# Altium PCB imx8mnano.PcbDoc
Units mil, origin at the board's own origin, x right, y up, seen from the top; angles counter-clockwise.
Board outline 6000 x 4000 mil, 4 copper layers (Top Layer, SIG1, SIG2, Bottom Layer), stack 20.374 mil thick; 10 components, 16 nets, 597 pads, 0 vias.
Unrouted connection lines stored in the file: 78.
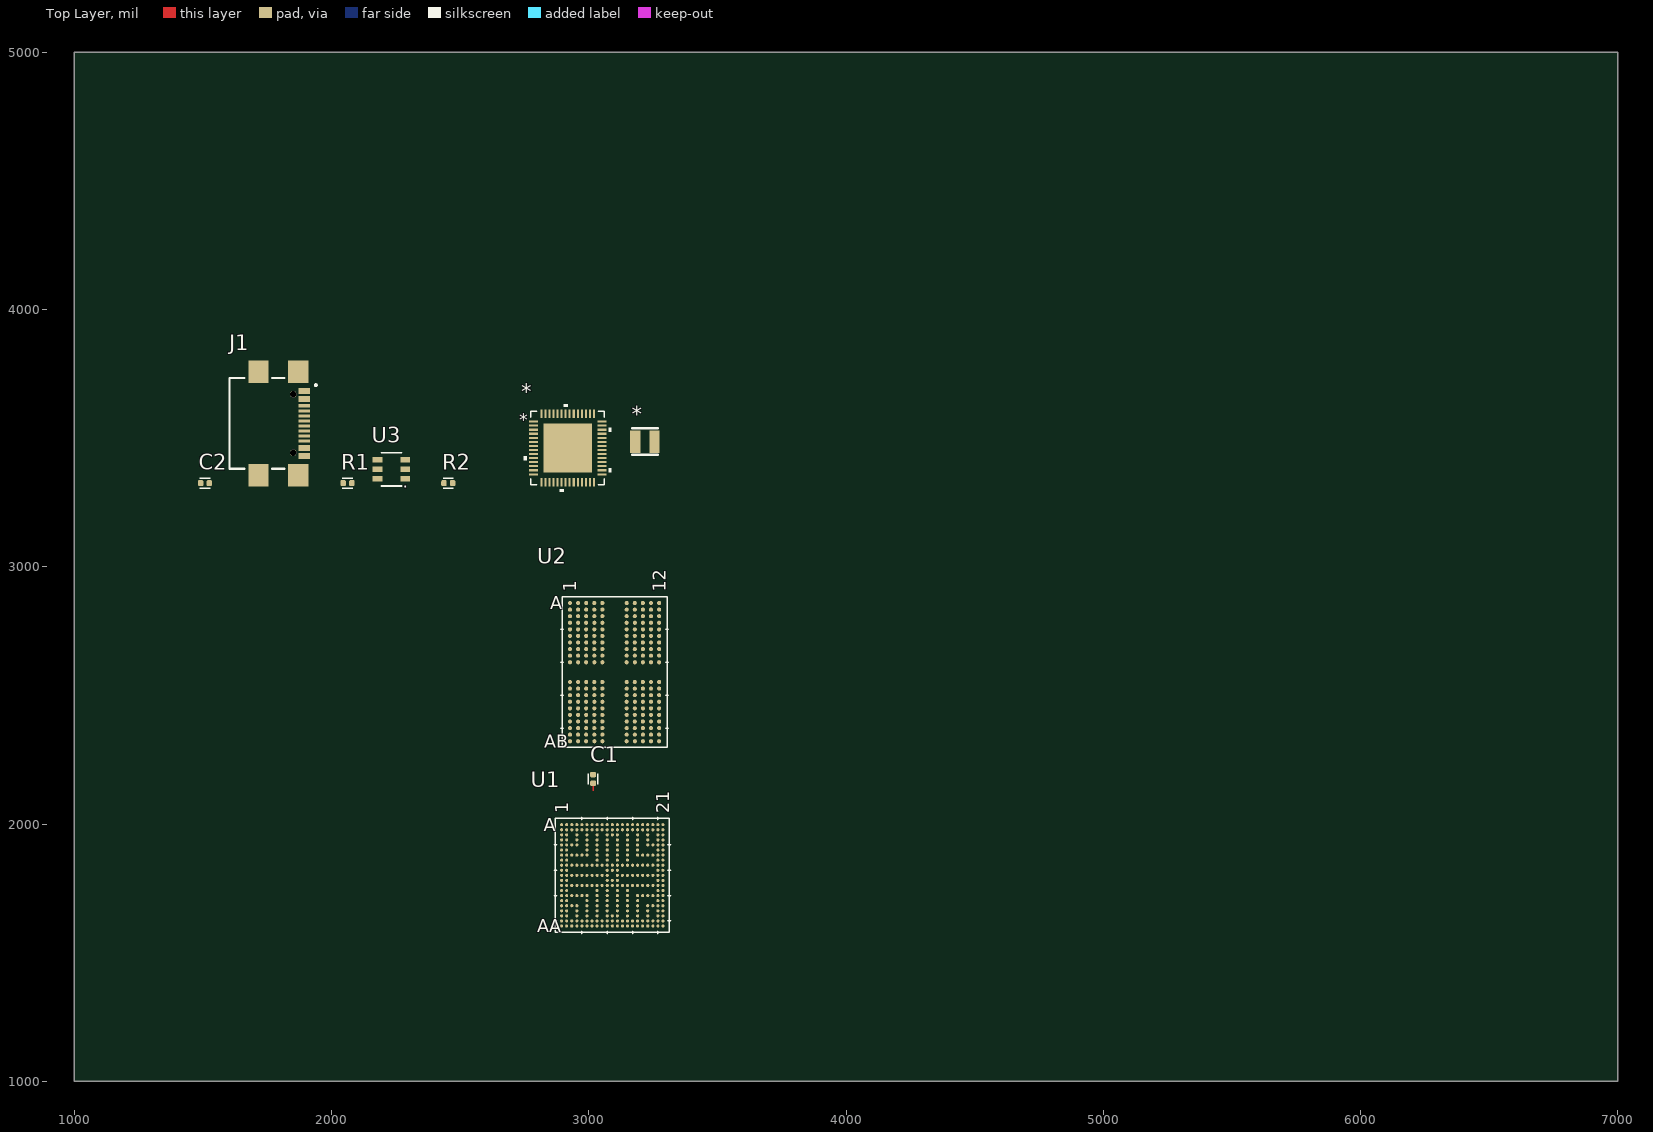
[diagram p0: Top Layer view]
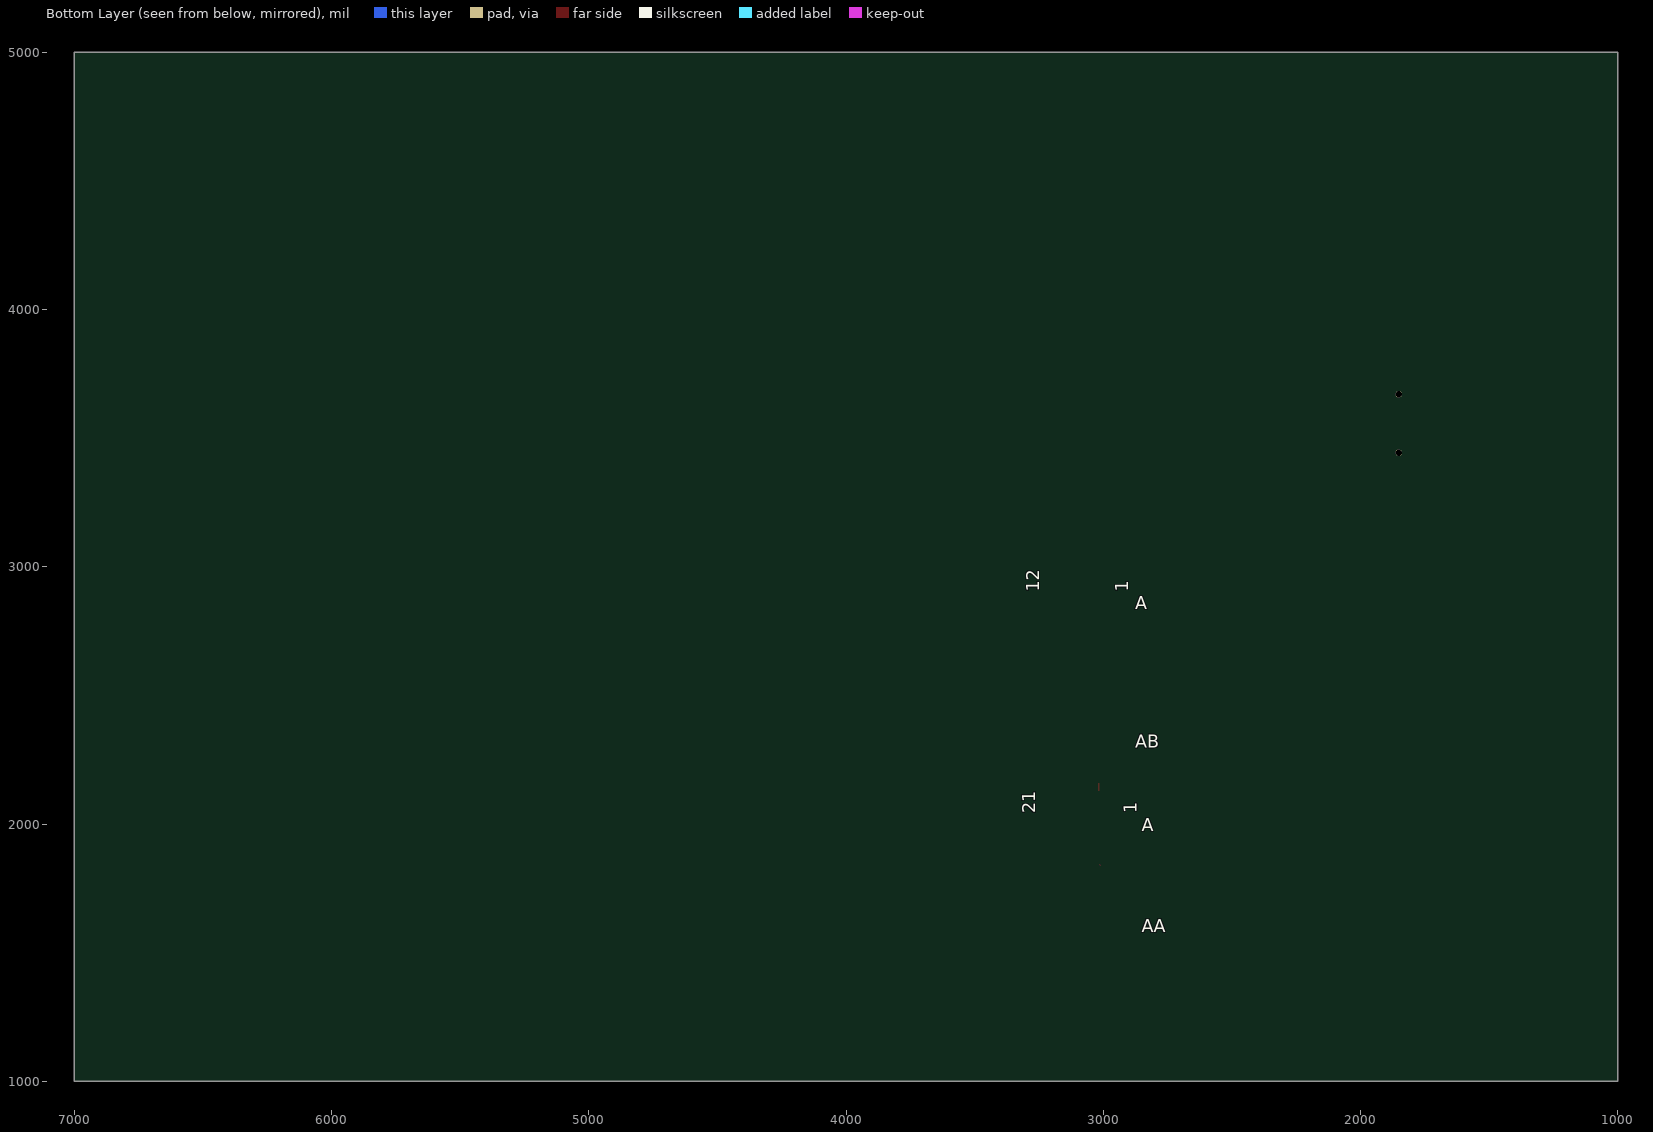
[diagram p1: Bottom Layer view, seen from below]
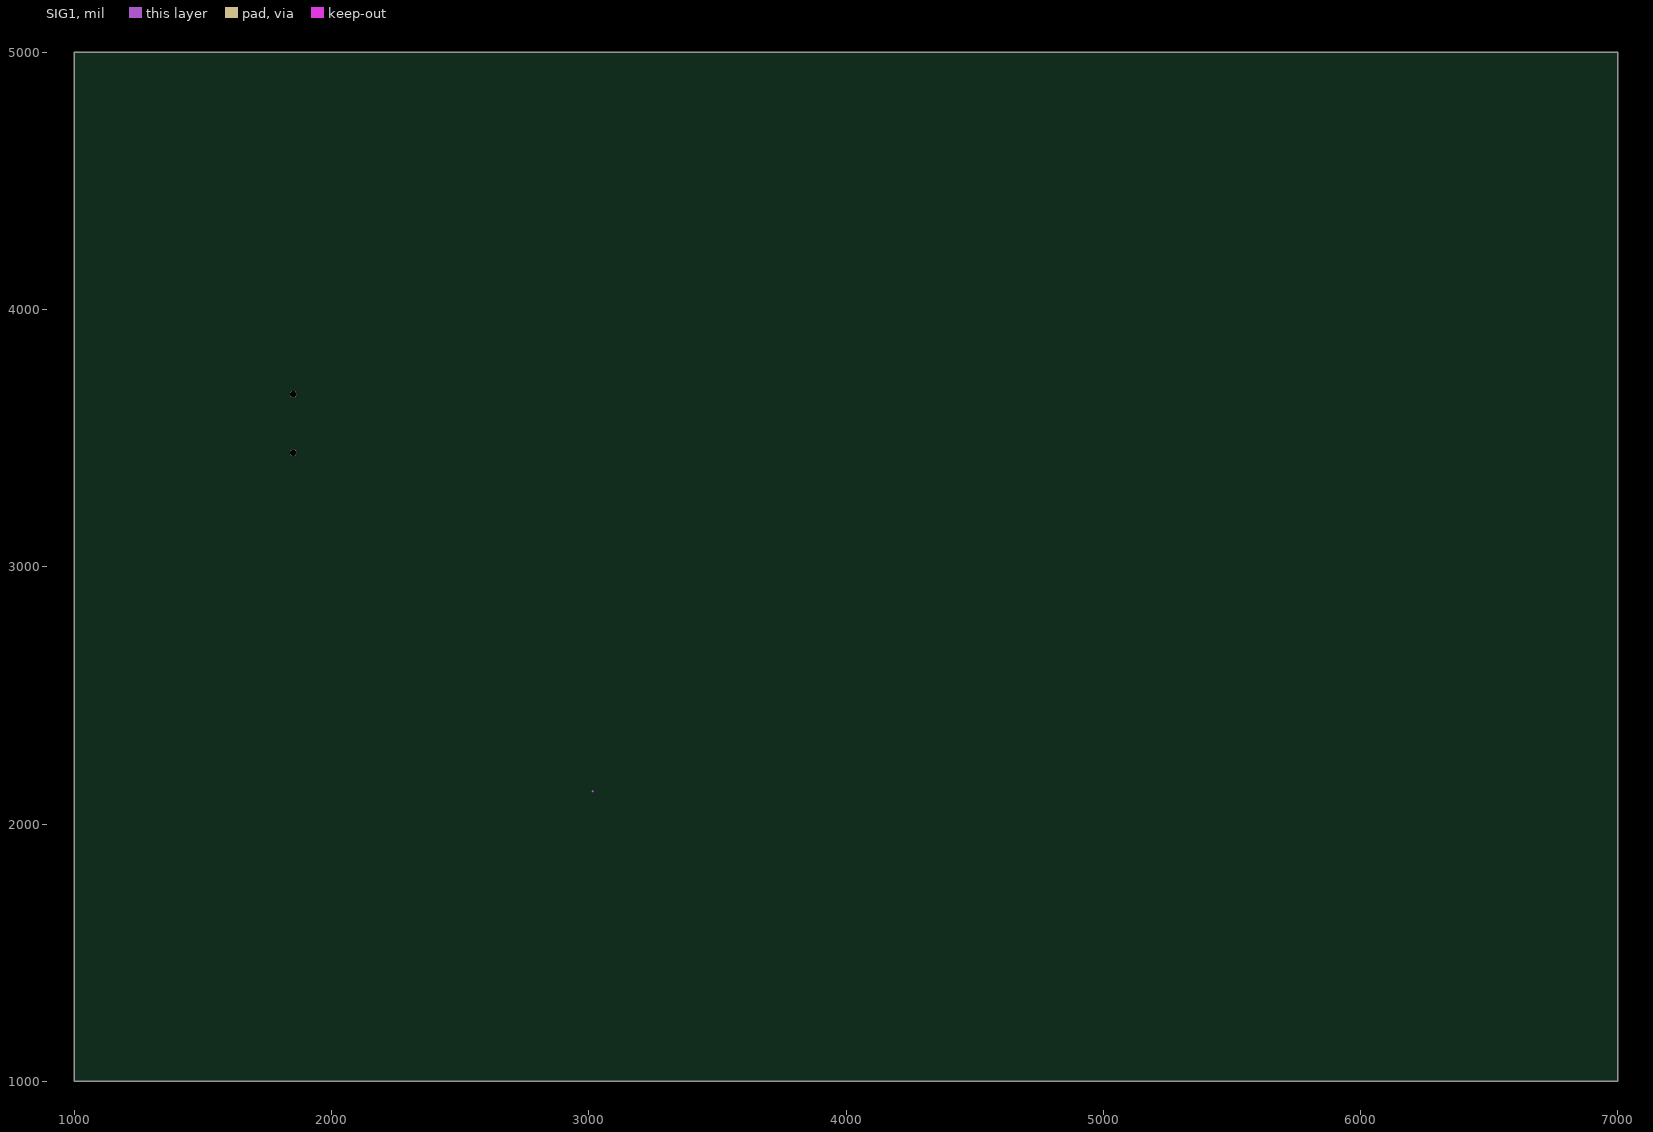
[diagram p2: SIG1]

## Layer stack, top to bottom
Top Solder: solder mask 0.4, Solder Resist, Dk 3.5
Top Layer: signal copper 1.378
Dielectric 4: prepreg 2.8, PP-006, Dk 4.1
Dielectric 2: prepreg 2.8, PP-006, Dk 4.1
SIG1: signal copper 0.709
Dielectric 1: core 5, Core-016, Dk 4.3
SIG2: signal copper 0.709
Dielectric 3: prepreg 2.8, PP-006, Dk 4.1
Dielectric 5: prepreg 2.8, PP-006, Dk 4.1
Bottom Layer: signal copper 1.378
Bottom Solder: solder mask 0.4, Solder Resist, Dk 3.5

## Board outline
1000,1000 7000,1000 7000,5000 1000,5000

## Design rules (kind name [scope] priority, off if disabled: settings)
Clearance Clearanceddr4 [WithinRoom('LPDDR4')] p1: gap=1 ignorepadtopadclearanceinfootprint=FALSE
Clearance [WithinRoom('imx8mnano_power')] p2: gap=1 ignorepadtopadclearanceinfootprint=FALSE
PolygonConnect [All] p1: connectstyle=Relief reliefconductorwidth=10 reliefentries=4 polygonreliefangle="90 Angle" airgapwidth=10
RoomDefinition USB [InComponentClass('USB')] p1: confinementstyle=ConfineIn formatcopy=TRUE lockcomponents=FALSE outline 2494,3817 1417,3817 1417,3197 2494,3197
RoomDefinition PMIC [InComponentClass('PMIC')] p2: confinementstyle=ConfineIn formatcopy=TRUE lockcomponents=FALSE outline 2549,3286.88 3368,3286.88 3368,3717.88 2549,3717.88
RoomDefinition imx8mnano_power [InComponentClass('imx8mnano_power')] p3: confinementstyle=ConfineIn formatcopy=TRUE lockcomponents=FALSE outline 2673,1508 3433,1508 3433,2232 2673,2232
RoomDefinition LPDDR4 [InComponentClass('LPDDR4')] p4: confinementstyle=ConfineIn formatcopy=TRUE lockcomponents=FALSE outline 2726.47,2258.77 3362.47,2258.77 3362.47,3101.77 2726.47,3101.77
RoutingVias Routingddr4 [All] p1: holewidth=3 width=10 viastyle="Through Hole" minholewidth=1.5 minwidth=10 maxholewidth=5 maxwidth=15
RoutingVias [WithinRoom('imx8mnano_power')] p2: holewidth=3 width=10 viastyle="Through Hole" minholewidth=1.5 minwidth=10 maxholewidth=5 maxwidth=15
SolderMaskExpansion SolderMaskExpansion_BGA [WithinRoom('imx8mnano_power') or WithinRoom('LPDDR4')] p1: expansion=0.57 istentingtop=FALSE
Width widthddr4 [WithinRoom('LPDDR4')] p1: maxlimit=5 minlimit=2 preferedwidth=3
Width widthtop [OnLayer('Top Layer') and not WithinRoom('imx8mnano_power')] p2: maxlimit=10 minlimit=10 preferedwidth=10
Width Widthimx [WithinRoom('imx8mnano_power')] p3: maxlimit=5 minlimit=2 preferedwidth=3
30 further rules are at their usual default settings.

## Classes and differential pairs
component class USB: C2 J1 R1 R2 U3
component class PMIC: *
component class imx8mnano_power: C1 U1
component class LPDDR4: U2

## Components (designator, comment, footprint, x,y, rotation, side; value= is the part's Value field where it differs from the comment)
* "PCA9450BHNY" HVQFN56_SOT949-6_NXP 2918,3461.88 r0 top
* "SPH252010H2R2MT" IND-SMD_L2.5-W2.0_SWPA252012S 3218,3486.26 r0 top
C1 "CL05A106MQ5NUNC" CL05A106MQ5NUNC 3017,2175.07 r90 top
C2 "104" CAPC1005X55N2 1508,3325 r180 top
J1 "USB-C" GCT_USB4110GFA 1851,3557 r270 top
R1 "5K1" RC0402 2062,3325 r180 top
R2 "5K1" RC0402 2454,3325 r180 top
U1 "MIMX8MN5DVPIZAA" MIMX8MN5DVPIZAA_NXP 3091.45,1800.38 r0 top
U2 "MT53E256M16D1FW-046 AIT:B" TFBGA200_10X14p5X1p1_FW_MRN-M 3100.23,2590.39 r0 top
U3 "USBLC6" SOT23-6L_STM 2233,3379 r180 top

## Footprints (in the part's own frame and the unit in brackets; to place one, negate y for a bottom-side part, rotate by r counter-clockwise, add the part's x,y. Pads: shape width x height; smd on the part's side, far side on the other; paste and mask are expansions set on the pad)
CAPC1005X55N2 [mm]
  rrect53% 0.54x0.6 smd: 1(-0.43,0) 2(0.43,0)
  silkscreen extent -0.5,-0.48 0.5,0.48, body extent -0.52,-0.28 0.52,0.28, height 0.56
CL05A106MQ5NUNC [mm]
  rrect53% 0.54x0.6 smd: 1(-0.43,0) 2(0.43,0)
  silkscreen extent -0.5,-0.48 0.5,0.48
GCT_USB4110GFA [mm]
  rect 0.6x1.15 smd: A1/B12(-3.2,1.075) A4/B9(-2.4,1.075) B1/A12(3.2,1.075) B4/A9(2.4,1.075)
  rect 0.3x1.15 smd: A5(-1.25,1.075) A6(-0.25,1.075) A7(0.25,1.075) A8(1.25,1.075) B5(1.75,1.075) B6(0.75,1.075) B7(-0.75,1.075) B8(-1.75,1.075)
  rect 2.18x2 smd: S1(-5.11,0.5) S2(5.11,0.5) S3(-5.11,-3.43) S4(5.11,-3.43)
  round 0.65 hole 0.65 unplated: ""(-2.89,0) ""(2.89,0)
  silkscreen extent -4.47,-6.28 4.47,2.33, body extent -5.65,-6.28 5.65,1.42, height 3.26
HVQFN56_SOT949-6_NXP [mil]
  rect 34x8 smd paste+0 mask+0: 1(-133,102.36) 2(-133,86.61) 3(-133,70.87) 4(-133,55.12) 5(-133,39.37) 6(-133,23.62) 7(-133,7.87) 8(-133,-7.87) 9(-133,-23.62) 10(-133,-39.37) 11(-133,-55.12) 12(-133,-70.87) 13(-133,-86.61) 14(-133,-102.36) 29(133,-102.36) 30(133,-86.61) 31(133,-70.87) 32(133,-55.12) 33(133,-39.37) 34(133,-23.62) 35(133,-7.87) 36(133,7.87) 37(133,23.62) 38(133,39.37) 39(133,55.12) 40(133,70.87) 41(133,86.61) 42(133,102.36)
  rect 8x34 smd paste+0 mask+0: 15(-102.36,-133) 16(-86.61,-133) 17(-70.87,-133) 18(-55.12,-133) 19(-39.37,-133) 20(-23.62,-133) 21(-7.87,-133) 22(7.87,-133) 23(23.62,-133) 24(39.37,-133) 25(55.12,-133) 26(70.87,-133) 27(86.61,-133) 28(102.36,-133) 43(102.36,133) 44(86.61,133) 45(70.87,133) 46(55.12,133) 47(39.37,133) 48(23.62,133) 49(7.87,133) 50(-7.87,133) 51(-23.62,133) 52(-39.37,133) 53(-55.12,133) 54(-70.87,133) 55(-86.61,133) 56(-102.36,133)
  rect 189x189 smd paste-94.5 mask+0: 57(0,0)
  silkscreen extent -170,-170 170,170, body extent -138,-138 138,138, height 39
IND-SMD_L2.5-W2.0_SWPA252012S [mm]
  rect 1x2.2 smd: 1(-0.95,0) 2(0.95,0)
  silkscreen extent -1.24,-1.3 1.26,1.32
MIMX8MN5DVPIZAA_NXP [mil]
  round 12 smd paste+0 mask+0: A1(-196.9,196.9) A2(-177.21,196.9) A3(-157.52,196.9) A4(-137.83,196.9) A5(-118.14,196.9) A6(-98.45,196.9) A7(-78.76,196.9) A8(-59.07,196.9) A9(-39.38,196.9) A10(-19.69,196.9) A11(0,196.9) A12(19.69,196.9) A13(39.38,196.9) A14(59.07,196.9) A15(78.76,196.9) A16(98.45,196.9) A17(118.14,196.9) A18(137.83,196.9) A19(157.52,196.9) A20(177.21,196.9) A21(196.9,196.9) AA1(-196.9,-196.9) AA2(-177.21,-196.9) AA3(-157.52,-196.9) AA4(-137.83,-196.9) AA5(-118.14,-196.9) AA6(-98.45,-196.9) AA7(-78.76,-196.9) AA8(-59.07,-196.9) AA9(-39.38,-196.9) AA10(-19.69,-196.9) AA11(0,-196.9) AA12(19.69,-196.9) AA13(39.38,-196.9) AA14(59.07,-196.9) AA15(78.76,-196.9) AA16(98.45,-196.9) AA17(118.14,-196.9) AA18(137.83,-196.9) AA19(157.52,-196.9) AA20(177.21,-196.9) AA21(196.9,-196.9) B1(-196.9,177.21) B2(-177.21,177.21) B3(-157.52,177.21) B4(-137.83,177.21) B5(-118.14,177.21) B6(-98.45,177.21) B7(-78.76,177.21) B8(-59.07,177.21) B9(-39.38,177.21) B10(-19.69,177.21) B11(0,177.21) B12(19.69,177.21) B13(39.38,177.21) B14(59.07,177.21) B15(78.76,177.21) B16(98.45,177.21) B17(118.14,177.21) B18(137.83,177.21) B19(157.52,177.21) B20(177.21,177.21) B21(196.9,177.21) C1(-196.9,157.52) C2(-177.21,157.52) C4(-137.83,157.52) C6(-98.45,157.52) C8(-59.07,157.52) C10(-19.69,157.52) C11(0,157.52) C12(19.69,157.52) C14(59.07,157.52) C16(98.45,157.52) C18(137.83,157.52) C20(177.21,157.52) C21(196.9,157.52) D1(-196.9,137.83) D2(-177.21,137.83) D4(-137.83,137.83) D6(-98.45,137.83) D8(-59.07,137.83) D10(-19.69,137.83) D12(19.69,137.83) D14(59.07,137.83) D16(98.45,137.83) D18(137.83,137.83) D20(177.21,137.83) D21(196.9,137.83) E1(-196.9,118.14) E2(-177.21,118.14) E3(-157.52,118.14) E4(-137.83,118.14) E6(-98.45,118.14) E8(-59.07,118.14) E10(-19.69,118.14) E12(19.69,118.14) E14(59.07,118.14) E16(98.45,118.14) E18(137.83,118.14) E19(157.52,118.14) E20(177.21,118.14) E21(196.9,118.14) F1(-196.9,98.45) F2(-177.21,98.45) F6(-98.45,98.45) F8(-59.07,98.45) F10(-19.69,98.45) F12(19.69,98.45) F14(59.07,98.45) F16(98.45,98.45) F20(177.21,98.45) F21(196.9,98.45) G1(-196.9,78.76) G2(-177.21,78.76) G3(-157.52,78.76) G4(-137.83,78.76) G5(-118.14,78.76) G6(-98.45,78.76) G8(-59.07,78.76) G10(-19.69,78.76) G12(19.69,78.76) G14(59.07,78.76) G16(98.45,78.76) G17(118.14,78.76) G18(137.83,78.76) G19(157.52,78.76) G20(177.21,78.76) G21(196.9,78.76) H1(-196.9,59.07) H2(-177.21,59.07) H8(-59.07,59.07) H10(-19.69,59.07) H12(19.69,59.07) H14(59.07,59.07) H20(177.21,59.07) H21(196.9,59.07) J1(-196.9,39.38) J2(-177.21,39.38) J3(-157.52,39.38) J4(-137.83,39.38) J5(-118.14,39.38) J6(-98.45,39.38) J7(-78.76,39.38) J8(-59.07,39.38) J9(-39.38,39.38) J10(-19.69,39.38) J11(0,39.38) J12(19.69,39.38) J13(39.38,39.38) J14(59.07,39.38) J15(78.76,39.38) J16(98.45,39.38) J17(118.14,39.38) J18(137.83,39.38) J19(157.52,39.38) J20(177.21,39.38) J21(196.9,39.38) K1(-196.9,19.69) K2(-177.21,19.69) K10(-19.69,19.69) K11(0,19.69) K12(19.69,19.69) K20(177.21,19.69) K21(196.9,19.69) L1(-196.9,0) L2(-177.21,0) L3(-157.52,0) L4(-137.83,0) L5(-118.14,0) L6(-98.45,0) L7(-78.76,0) L8(-59.07,0) L9(-39.38,0) L10(-19.69,0) L12(19.69,0) L13(39.38,0) L14(59.07,0) L15(78.76,0) L16(98.45,0) L17(118.14,0) L18(137.83,0) L19(157.52,0) L20(177.21,0) L21(196.9,0) M1(-196.9,-19.69) M2(-177.21,-19.69) M10(-19.69,-19.69) M11(0,-19.69) M12(19.69,-19.69) M20(177.21,-19.69) M21(196.9,-19.69) N1(-196.9,-39.38) N2(-177.21,-39.38) N3(-157.52,-39.38) N4(-137.83,-39.38) N5(-118.14,-39.38) N6(-98.45,-39.38) N7(-78.76,-39.38) N8(-59.07,-39.38) N9(-39.38,-39.38) N10(-19.69,-39.38) N11(0,-39.38) N12(19.69,-39.38) N13(39.38,-39.38) N14(59.07,-39.38) N15(78.76,-39.38) N16(98.45,-39.38) N17(118.14,-39.38) N18(137.83,-39.38) N19(157.52,-39.38) N20(177.21,-39.38) N21(196.9,-39.38) P1(-196.9,-59.07) P2(-177.21,-59.07) P8(-59.07,-59.07) P10(-19.69,-59.07) P12(19.69,-59.07) P14(59.07,-59.07) P20(177.21,-59.07) P21(196.9,-59.07) R1(-196.9,-78.76) R2(-177.21,-78.76) R3(-157.52,-78.76) R4(-137.83,-78.76) R5(-118.14,-78.76) R6(-98.45,-78.76) R8(-59.07,-78.76) R10(-19.69,-78.76) R12(19.69,-78.76) R14(59.07,-78.76) R16(98.45,-78.76) R17(118.14,-78.76) R18(137.83,-78.76) R19(157.52,-78.76) R20(177.21,-78.76) R21(196.9,-78.76) T1(-196.9,-98.45) T2(-177.21,-98.45) T6(-98.45,-98.45) T8(-59.07,-98.45) T10(-19.69,-98.45) T12(19.69,-98.45) T14(59.07,-98.45) T16(98.45,-98.45) T20(177.21,-98.45) T21(196.9,-98.45) U1(-196.9,-118.14) U2(-177.21,-118.14) U3(-157.52,-118.14) U4(-137.83,-118.14) U6(-98.45,-118.14) U8(-59.07,-118.14) U10(-19.69,-118.14) U12(19.69,-118.14) U14(59.07,-118.14) U16(98.45,-118.14) U18(137.83,-118.14) U19(157.52,-118.14) U20(177.21,-118.14) U21(196.9,-118.14) V1(-196.9,-137.83) V2(-177.21,-137.83) V4(-137.83,-137.83) V6(-98.45,-137.83) V8(-59.07,-137.83) V10(-19.69,-137.83) V12(19.69,-137.83) V14(59.07,-137.83) V16(98.45,-137.83) V18(137.83,-137.83) V20(177.21,-137.83) V21(196.9,-137.83) W1(-196.9,-157.52) W2(-177.21,-157.52) W4(-137.83,-157.52) W6(-98.45,-157.52) W8(-59.07,-157.52) W10(-19.69,-157.52) W11(0,-157.52) W12(19.69,-157.52) W14(59.07,-157.52) W16(98.45,-157.52) W18(137.83,-157.52) W20(177.21,-157.52) W21(196.9,-157.52) Y1(-196.9,-177.21) Y2(-177.21,-177.21) Y3(-157.52,-177.21) Y4(-137.83,-177.21) Y5(-118.14,-177.21) Y6(-98.45,-177.21) Y7(-78.76,-177.21) Y8(-59.07,-177.21) Y9(-39.38,-177.21) Y10(-19.69,-177.21) Y11(0,-177.21) Y12(19.69,-177.21) Y13(39.38,-177.21) Y14(59.07,-177.21) Y15(78.76,-177.21) Y16(98.45,-177.21) Y17(118.14,-177.21) Y18(137.83,-177.21) Y19(157.52,-177.21) Y20(177.21,-177.21) Y21(196.9,-177.21)
  silkscreen extent -226,-226 226,226
RC0402 [mm]
  rrect53% 0.54x0.6 smd: 1(-0.43,0) 2(0.43,0)
  silkscreen extent -0.5,-0.48 0.5,0.48, body extent -0.52,-0.28 0.52,0.28, height 0.56
SOT23-6L_STM [mil]
  rect 38.5x22 smd paste+0 mask+0: 1(-53.75,37.4) 2(-53.75,0) 3(-53.75,-37.4) 4(53.75,-37.4) 5(53.75,0) 6(53.75,37.4)
  silkscreen extent -40,-65 40,65, body extent -59,-60 59,60, height 57
TFBGA200_10X14p5X1p1_FW_MRN-M [mil]
  round 16 smd paste+0 mask+0: A1(-173.23,268.69) A2(-141.73,268.69) A3(-110.24,268.69) A4(-78.74,268.69) A5(-47.24,268.69) A8(47.24,268.69) A9(78.74,268.69) A10(110.24,268.69) A11(141.73,268.69) A12(173.23,268.69) AA1(-173.23,-243.11) AA2(-141.73,-243.11) AA3(-110.24,-243.11) AA4(-78.74,-243.11) AA5(-47.24,-243.11) AA8(47.24,-243.11) AA9(78.74,-243.11) AA10(110.24,-243.11) AA11(141.73,-243.11) AA12(173.23,-243.11) AB1(-173.23,-268.7) AB2(-141.73,-268.7) AB3(-110.24,-268.7) AB4(-78.74,-268.7) AB5(-47.24,-268.7) AB8(47.24,-268.7) AB9(78.74,-268.7) AB10(110.24,-268.7) AB11(141.73,-268.7) AB12(173.23,-268.7) B1(-173.23,243.1) B2(-141.73,243.1) B3(-110.24,243.1) B4(-78.74,243.1) B5(-47.24,243.1) B8(47.24,243.1) B9(78.74,243.1) B10(110.24,243.1) B11(141.73,243.1) B12(173.23,243.1) C1(-173.23,217.51) C2(-141.73,217.51) C3(-110.24,217.51) C4(-78.74,217.51) C5(-47.24,217.51) C8(47.24,217.51) C9(78.74,217.51) C10(110.24,217.51) C11(141.73,217.51) C12(173.23,217.51) D1(-173.23,191.92) D2(-141.73,191.92) D3(-110.24,191.92) D4(-78.74,191.92) D5(-47.24,191.92) D8(47.24,191.92) D9(78.74,191.92) D10(110.24,191.92) D11(141.73,191.92) D12(173.23,191.92) E1(-173.23,166.33) E2(-141.73,166.33) E3(-110.24,166.33) E4(-78.74,166.33) E5(-47.24,166.33) E8(47.24,166.33) E9(78.74,166.33) E10(110.24,166.33) E11(141.73,166.33) E12(173.23,166.33) F1(-173.23,140.74) F2(-141.73,140.74) F3(-110.24,140.74) F4(-78.74,140.74) F5(-47.24,140.74) F8(47.24,140.74) F9(78.74,140.74) F10(110.24,140.74) F11(141.73,140.74) F12(173.23,140.74) G1(-173.23,115.15) G2(-141.73,115.15) G3(-110.24,115.15) G4(-78.74,115.15) G5(-47.24,115.15) G8(47.24,115.15) G9(78.74,115.15) G10(110.24,115.15) G11(141.73,115.15) G12(173.23,115.15) H1(-173.23,89.56) H2(-141.73,89.56) H3(-110.24,89.56) H4(-78.74,89.56) H5(-47.24,89.56) H8(47.24,89.56) H9(78.74,89.56) H10(110.24,89.56) H11(141.73,89.56) H12(173.23,89.56) J1(-173.23,63.97) J2(-141.73,63.97) J3(-110.24,63.97) J4(-78.74,63.97) J5(-47.24,63.97) J8(47.24,63.97) J9(78.74,63.97) J10(110.24,63.97) J11(141.73,63.97) J12(173.23,63.97) K1(-173.23,38.38) K2(-141.73,38.38) K3(-110.24,38.38) K4(-78.74,38.38) K5(-47.24,38.38) K8(47.24,38.38) K9(78.74,38.38) K10(110.24,38.38) K11(141.73,38.38) K12(173.23,38.38) N1(-173.23,-38.39) N2(-141.73,-38.39) N3(-110.24,-38.39) N4(-78.74,-38.39) N5(-47.24,-38.39) N8(47.24,-38.39) N9(78.74,-38.39) N10(110.24,-38.39) N11(141.73,-38.39) N12(173.23,-38.39) P1(-173.23,-63.98) P2(-141.73,-63.98) P3(-110.24,-63.98) P4(-78.74,-63.98) P5(-47.24,-63.98) P8(47.24,-63.98) P9(78.74,-63.98) P10(110.24,-63.98) P11(141.73,-63.98) P12(173.23,-63.98) R1(-173.23,-89.57) R2(-141.73,-89.57) R3(-110.24,-89.57) R4(-78.74,-89.57) R5(-47.24,-89.57) R8(47.24,-89.57) R9(78.74,-89.57) R10(110.24,-89.57) R11(141.73,-89.57) R12(173.23,-89.57) T1(-173.23,-115.16) T2(-141.73,-115.16) T3(-110.24,-115.16) T4(-78.74,-115.16) T5(-47.24,-115.16) T8(47.24,-115.16) T9(78.74,-115.16) T10(110.24,-115.16) T11(141.73,-115.16) T12(173.23,-115.16) U1(-173.23,-140.75) U2(-141.73,-140.75) U3(-110.24,-140.75) U4(-78.74,-140.75) U5(-47.24,-140.75) U8(47.24,-140.75) U9(78.74,-140.75) U10(110.24,-140.75) U11(141.73,-140.75) U12(173.23,-140.75) V1(-173.23,-166.34) V2(-141.73,-166.34) V3(-110.24,-166.34) V4(-78.74,-166.34) V5(-47.24,-166.34) V8(47.24,-166.34) V9(78.74,-166.34) V10(110.24,-166.34) V11(141.73,-166.34) V12(173.23,-166.34) W1(-173.23,-191.93) W2(-141.73,-191.93) W3(-110.24,-191.93) W4(-78.74,-191.93) W5(-47.24,-191.93) W8(47.24,-191.93) W9(78.74,-191.93) W10(110.24,-191.93) W11(141.73,-191.93) W12(173.23,-191.93) Y1(-173.23,-217.52) Y2(-141.73,-217.52) Y3(-110.24,-217.52) Y4(-78.74,-217.52) Y5(-47.24,-217.52) Y8(47.24,-217.52) Y9(78.74,-217.52) Y10(110.24,-217.52) Y11(141.73,-217.52) Y12(173.23,-217.52)
  silkscreen extent -209,-292 209,293

## Part data
*: "Power Manage Ic (Pmic) For I.mx 8M Nano Rohs Compliant: Yes", Manufacturer="NXP Semiconductors", Supplier Part Number 1=568-PCA9450BHNYCT-ND, Category="Power Management ICs", ComponentLink1Description=https://datasheet.octopart.com/PCA9450BHNY-NXP-Semiconductors-datasheet-150009921.pdf?src-supplier=Future+Electronics, ComponentLink1URL=https://datasheet.octopart.com/PCA9450BHNY-NXP-Semiconductors-datasheet-150009921.pdf?src-supplier=Future+Electronics, Manufacturer Part Number=PCA9450BHNY, Pricing 1="1=5.66, 10=4.331, 25=3.9992, 100=3.6339, 250=3.45972, 500=3.35474, 1000=3.26833 (USD)", RoHS=No, RoHS Compliant=Yes, Stock 1=7995, Supplier 1=Digikey
*: "Fixed Ind 2.220%UH 0.114 Ohm 1800", Manufacturer=Sunlord, Supplier Part Number 1=3442-SPH252010H2R2MTCT-ND, Category="Fixed Inductors", Manufacturer Part Number=SPH252010H2R2MT, Pricing 1="1=0.27, 10=0.207, 25=0.1872, 50=0.1736, 100=0.1609, 250=0.14548, 500=0.13478, 1000=0.125 (USD)", RoHS=Yes, RoHS Compliant=Yes, Stock 1=1953, Supplier 1=Digikey
C1: "Multilayer Ceramic Capacitor, 10 uF, 6.3 V, ï¿½ 20%, X5R, 0402 [1005 Metric]", Capacitance=10uF, Case Code (Imperial)=0402, Case Code (Metric)=1005, Dielectric=X5R, Manufacturer=Samsung, Max Operating Temperature=85°C, Min Operating Temperature=-55°C, Package Quantity=1, Tolerance=20%, Voltage Rating=6.3V, Case/Package=0402, Category="Ceramic Capacitors", ComponentLink1Description=https://datasheet.ciiva.com/16437/cl05a106mq5nunc-16437356.pdf?src-supplier=Future+Electronics, ComponentLink1URL=https://datasheet.ciiva.com/16437/cl05a106mq5nunc-16437356.pdf?src-supplier=Future+Electronics, ComponentLink2Description=https://datasheet.ciiva.com/26877/getdatasheetpartid-355289-26877841.pdf?src-supplier=Verical, ComponentLink2URL=https://datasheet.ciiva.com/26877/getdatasheetpartid-355289-26877841.pdf?src-supplier=Verical, Construction=Flat, Depth=0.5mm, Height=0.5mm, Length=1mm, Manufacturer Part Number=CL05A106MQ5NUNC, Mount="Surface Mount", Packaging="Tape and Reel", Pricing 1="10000=0.02499, 20000=0.02486, 40000=0.02474, 60000=0.02461, 80000=0.02448 (USD)", Radiation Hardening=No, RoHS=Yes, RoHS Compliant=Yes, Series=CL, Stock 1=540000, Supplier 1=Avnet, Supplier Part Number 1=CL05A106MQ5NUNC, Thickness=0.028inch, Width=0.02inch
C2: library part CC0402KRX7R7BB104, "Multilayer Ceramic Capacitor, 0.1 uF, 16 V, ï¿½ 10%, X7R, 0402 [1005 Metric]", Capacitance=100nF, Case Code (Imperial)=0402, Case Code (Metric)=1005, Dielectric=X7R, LCSC=C60474, Manufacturer=Yageo, Max Operating Temperature=125°C, Min Operating Temperature=-55°C, Package Quantity=1, Supplier Part Number 1=311-1338-1-ND, Temperature Coefficient=30ppm/°C, Tolerance=10%, Voltage=16V, Case/Package=0402, Category="Ceramic Capacitors", ComponentLink1Description=https://datasheet.ciiva.com/11788/0900766b80ce67ed-11788364.pdf?src-supplier=Rs, ComponentLink1URL=https://datasheet.ciiva.com/11788/0900766b80ce67ed-11788364.pdf?src-supplier=Rs, ComponentLink2Description=https://datasheet.ciiva.com/7978/1489800-7978111.pdf?src-supplier=Element14, ComponentLink2URL=https://datasheet.ciiva.com/7978/1489800-7978111.pdf?src-supplier=Element14, ComponentLink3Description=https://datasheet.ciiva.com/161/mlccorderingcode-161545.pdf?src-supplier=Digikey, ComponentLink3URL=https://datasheet.ciiva.com/161/mlccorderingcode-161545.pdf?src-supplier=Digikey, ComponentLink4Description=https://datasheet.ciiva.com/161/mlccorderingcode-161544.pdf?src-supplier=Digikey, ComponentLink4URL=https://datasheet.ciiva.com/161/mlccorderingcode-161544.pdf?src-supplier=Digikey, ComponentLink5Description=https://datasheet.ciiva.com/161/mlccorderingcode-161546.pdf?src-supplier=Digikey, ComponentLink5URL=https://datasheet.ciiva.com/161/mlccorderingcode-161546.pdf?src-supplier=Digikey, ComponentLink6Description=https://datasheet.ciiva.com/8033/1734573-8033661.pdf?src-supplier=Element14, ComponentLink6URL=https://datasheet.ciiva.com/8033/1734573-8033661.pdf?src-supplier=Element14, ComponentLink7Description=https://datasheet.ciiva.com/11587/upy-gphc-x7r-6-3v-to-50v-8-11587305.pdf?src-supplier=Avnet, ComponentLink7URL=https://datasheet.ciiva.com/11587/upy-gphc-x7r-6-3v-to-50v-8-11587305.pdf?src-supplier=Avnet, Depth=0.5mm, Halogen Free=5694HalogenFree, Height=0.5mm, Lead Free=5697LeadFree, Length=1mm, Manufacturer Part Number=CC0402KRX7R7BB104, Material=4241ConductorMaterial, Mount="Surface Mount", Number of Pins=2, Packaging="Tape and Reel", Pricing 1="1=0.1, 10=0.024, 50=0.0164, 100=0.0139, 500=0.0098, 1000=0.00852, 2500=0.00718, 5000=0.00636 (USD)", Radiation Hardening=No, Reach SVHC Compliant=No, RoHS=Yes, RoHS Compliant=Yes, Series=CC, Stock 1=15609894, Supplier 1=Digikey, Termination=SMD/SMT, Thickness=0.022inch, Voltage Rating=16V, Voltage Rating (AC)=16V, Voltage Rating (DC)=16V, Width=0.02inch
J1: library part USB4110-GF-A, "USB Connector, 16 Contact(s), Male, Right Angle, Surface Mount Terminal, Locking, Receptacle", Manufacturer="Global Connector Technology", Supplier Part Number 1=2073-USB4110-GF-A-1-ND, Voltage Rating=20V, Category="USB Connectors", ComponentLink1Description=https://gct.co/files/drawings/usb4110.pdf?src-supplier=Digikey, ComponentLink1URL=https://gct.co/files/drawings/usb4110.pdf?src-supplier=Digikey, Contact Material=153,157ConductorMaterial, Height=3.46mm, LCSC=USB4110-GF-A, Manufacturer Part Number=USB4110-GF-A, Number of Contacts=16NUMBER, Number of Pins=16NUMBER, Orientation=5496OrientationType, Pricing 1="1=1.64, 10=1.244, 25=1.1176, 50=1.032, 100=0.9547, 250=0.86368, 500=0.80254 (USD)", RoHS=No, Stock 1=30215, Supplier 1=Digikey, USB Standard=6108USBStandard
R1 R2: library part RC0402FR-075K1L, "SMD Chip Resistor, 5.1 kOhm, ï¿½ 1%, 62.5 mW, 0402 [1005 Metric], Thick Film, General Purpose", Case Code (Imperial)=0402, Case Code (Metric)=1005, LCSC=C105872, Manufacturer=Yageo, Max Operating Temperature=155°C, Max Power Dissipation=63mW, Min Operating Temperature=-55°C, Package Quantity=1, Resistance=5.1kR, Resistance Tolerance=1%, Resistor Type="Thick Film", Supplier Part Number 1=311-5.10KLRCT-ND, Temperature Coefficient=100ppm/°C, Voltage Rating=50V, Case/Package=0402, Category="Chip SMD Resistors", Construction=Rectangular, Depth=0.5mm, Features="Moisture Resistant", Height=0.016inch, Lead Free=5697LeadFree, Length=1mm, Manufacturer Part Number=RC0402FR-075K1L, Military Standard=Not, Number of Terminations=2, Packaging="Tape and Reel", Power Rating=63mW, Pricing 1="1=0.1, 10=0.009, 50=0.0072, 100=0.0041, 500=0.00306 (USD)", Reach SVHC Compliant=Unknown, RoHS=Yes, RoHS Compliant=Yes, Series=RC, Stock 1=868211, Supplier 1=Digikey, Technology="THICK FILM", Termination=SMD/SMT, Tolerance=1%, Voltage Rating (DC)=50V, Width=0.02inch, Working Voltage=50V
U1: "I.mx 8M Nano Ultralite, Tray Multiple Dp Bakeable, Tray Rohs Compliant: Yes", Manufacturer="NXP Semiconductors", Supplier Part Number 1=568-MIMX8MN5DVPIZAA-ND, Category=Microprocessors, Manufacturer Part Number=MIMX8MN5DVPIZAA, Pricing 1="1=24.94, 10=20.041, 25=18.818, 168=17.09119, 336=16.65952, 504=16.44345 (USD)", RoHS=Yes, Stock 1=138, Supplier 1=Digikey
U2: "No Description Available", Mfr_Name=Micron, RefDes=RefDes, Type=Memory
U3: library part USBLC6-2SC6, "ESD Suppressor Diode Array Dual Uni-Dir 15kV Air Gap/15kV Contact Disc 6-Pin SOT-23 T/R", Breakdown Voltage=6V, Capacitance=3.5pF, Case/Package=SOT-23, Clamping Voltage=17V, LCSC=C5250994, Leakage Current=150nA, Manufacturer=STMicroelectronics, Max Operating Temperature=125°C, Max Repetitive Reverse Voltage (Vrrm)=5.25V, Min Operating Temperature=-40°C, Operating Supply Voltage=1.1V, Package Quantity=3000, Peak Pulse Current=5A, Power Line Protection=Yes, Supplier Part Number 1=497-5235-1-ND, Test Current=1mA, Working Voltage=5V, Category="TVS Diodes", Clamping Voltage-Max=17V, ComponentLink1Description=https://datasheet.ciiva.com/1268/1690354-1268384.pdf?src-supplier=Element14, ComponentLink1URL=https://datasheet.ciiva.com/1268/1690354-1268384.pdf?src-supplier=Element14, ComponentLink2Description=https://datasheet.ciiva.com/4508/cd00050750-113117-4508433.pdf?src-supplier=Mouser, ComponentLink2URL=https://datasheet.ciiva.com/4508/cd00050750-113117-4508433.pdf?src-supplier=Mouser, ComponentLink3Description=https://datasheet.ciiva.com/41444/001184109-da-01-en-ic-esd-protecti-usblc6-2sc6-sot-23-6-stm-41444156.pdf?src-supplier=Conrad, ComponentLink3URL=https://datasheet.ciiva.com/41444/001184109-da-01-en-ic-esd-protecti-usblc6-2sc6-sot-23-6-stm-41444156.pdf?src-supplier=Conrad, Data Rate=480Mbps, Depth=1.75mm, Direction=Unidirectional,Bidirectional, ESD Protection=Yes, Height=1.3mm, Lead Free="Lead Free", Length=3.05mm, Manufacturer Part Number=USBLC6-2SC6, Max Breakdown Voltage=6V, Max Reverse Leakage Current=150nA, Min Breakdown Voltage=6V, Mount="Surface Mount", Number of Bidirectional Channels=2, Number of Channels=2, Number of Elements=1, Number of Pins=6, Packaging="Tape and Reel", Polarity=Unidirectional,Bidirectional, Pricing 1="1=0.36, 10=0.243, 100=0.163, 500=0.127, 1000=0.114, 3000=0.09, 6000=0.084, 9000=0.078, 15000=0.077, 21000=0.0755, 30000=0.075 (USD)", Radiation Hardening=No, Reach SVHC Compliant=No, Reverse Breakdown Voltage=6V, Reverse Standoff Voltage=5.25V, RoHS=Yes, RoHS Compliant=Yes, Series=USB, Stock 1=85420, Supplier 1=Digikey, Termination=SMD/SMT, Width=1.75mm

## Nets (pads, with @x,y where several pads share a name; then routed paths per layer and width w, separated by ;. In a path a pad name is that pad's centre, name@x,y a point inside that pad or via, vN(x,y) a via of type N, cw(c..) or ccw(c..) an arc to the next point about the centre after c; other vN are vias at no path point)
GND: C1.2 C2.2 J1.A1/B12 J1.B1/A12 J1.S1 J1.S2 J1.S3 J1.S4 R1.2 R2.2 U2.A3 U2.A10 U2.AB3 U2.AB5 U2.AB8 U2.AB10 U2.D2 U2.D4 U2.D9 U2.D11 U2.E1 U2.E5 U2.E8 U2.E12 U3.2
Net*_1: *.1@3180.58,3486.26 *.37
NetC1_1: C1.1 U1.J6 U1.J7 | length 36.7
  Top Layer w5: U1.J7@3011.35,1841.1 U1.J7 ; 3017,2129 C1.1
  SIG1 w5: 3013,2125 3017,2129
NetC2_1: C2.1 J1.A4/B9 J1.B4/A9 U3.5
NetJ1_A5: J1.A5 R1.1
NetJ1_A6: J1.A6 J1.B6 U3.1
NetJ1_A7: J1.A7 J1.B7 U3.3
NetJ1_B5: J1.B5 R2.1
NetU2_A4: U2.A4 U2.A9 U2.AB4 U2.AB9
NetU2_B3: U2.B3 U2.B5 U2.B8
NetU2_B12: U2.B12 U2.C1
NetU2_C5: U2.C5 U2.C8 U2.C12
NetU2_F1: U2.F1 U2.G4 U2.G9
NetU2_G1: U2.G1 U2.G3 U2.G5 U2.G8 U2.G10 U2.G12
NVCC_DRAM_1V1: U1.N6 U1.N7 U2.AA3 U2.AA5 U2.AA8 U2.AA10 U2.D1 U2.D5 U2.D8 U2.D12 U2.F3 U2.F5 U2.F8 U2.F10 U2.F12 U2.H1 U2.H5 U2.H8 U2.H12
VSYS_5V: *.16 *.17 *.18 *.33 *.34 *.35 *.47 *.48 *.49
pads on no net: *.1@2785,3564.24 *.2 *.3 *.4 *.5 *.6 *.7 *.8 *.9 *.10 *.11 *.12 *.13 *.14 *.15 *.19 *.20 *.21 *.22 *.23 *.24 *.25 *.26 *.27 *.28 *.29 *.30 *.31 *.32 *.36 *.38 *.39 *.40 *.41 *.42 *.43 *.44 *.45 *.46 *.50 *.51 *.52 *.53 *.54 *.55 *.56 *.57 J1. J1.A8 J1.B8 U1.A1 U1.A2 U1.A3 U1.A4 U1.A5 U1.A6 U1.A7 U1.A8 U1.A9 U1.A10 U1.A11 U1.A12 U1.A13 U1.A14 U1.A15 U1.A16 U1.A17 U1.A18 U1.A19 U1.A20 U1.A21 U1.AA1 U1.AA2 U1.AA3 U1.AA4 U1.AA5 U1.AA6 U1.AA7 U1.AA8 U1.AA9 U1.AA10 U1.AA11 U1.AA12 U1.AA13 U1.AA14 U1.AA15 U1.AA16 U1.AA17 U1.AA18 U1.AA19 U1.AA20 U1.AA21 U1.B1 U1.B2 U1.B3 U1.B4 U1.B5 U1.B6 U1.B7 U1.B8 U1.B9 U1.B10 U1.B11 U1.B12 U1.B13 U1.B14 U1.B15 U1.B16 U1.B17 U1.B18 U1.B19 U1.B20 U1.B21 U1.C1 U1.C2 U1.C4 U1.C6 U1.C8 U1.C10 U1.C11 U1.C12 U1.C14 U1.C16 U1.C18 U1.C20 U1.C21 U1.D1 U1.D2 U1.D4 U1.D6 U1.D8 U1.D10 U1.D12 U1.D14 U1.D16 U1.D18 U1.D20 U1.D21 U1.E1 U1.E2 U1.E3 U1.E4 U1.E6 U1.E8 U1.E10 U1.E12 U1.E14 U1.E16 U1.E18 U1.E19 U1.E20 U1.E21 U1.F1 U1.F2 U1.F6 U1.F8 U1.F10 U1.F12 U1.F14 U1.F16 U1.F20 U1.F21 U1.G1 U1.G2 U1.G3 U1.G4 U1.G5 U1.G6 U1.G8 U1.G10 U1.G12 U1.G14 U1.G16 U1.G17 U1.G18 U1.G19 U1.G20 U1.G21 U1.H1 U1.H2 U1.H8 U1.H10 U1.H12 U1.H14 U1.H20 U1.H21 U1.J1 U1.J2 U1.J3 U1.J4 U1.J5 U1.J8 U1.J9 U1.J10 U1.J11 U1.J12 U1.J13 U1.J14 U1.J15 U1.J16 U1.J17 U1.J18 U1.J19 U1.J20 U1.J21 U1.K1 U1.K2 U1.K10 U1.K11 U1.K12 U1.K20 U1.K21 U1.L1 U1.L2 U1.L3 U1.L4 U1.L5 U1.L6 U1.L7 U1.L8 U1.L9 U1.L10 U1.L12 U1.L13 U1.L14 U1.L15 U1.L16 U1.L17 U1.L18 U1.L19 U1.L20 U1.L21 U1.M1 U1.M2 U1.M10 U1.M11 U1.M12 U1.M20 U1.M21 U1.N1 U1.N2 U1.N3 U1.N4 U1.N5 U1.N8 U1.N9 U1.N10 U1.N11 U1.N12 U1.N13 U1.N14 U1.N15 U1.N16 U1.N17 U1.N18 U1.N19 U1.N20 U1.N21 U1.P1 U1.P2 U1.P8 U1.P10 U1.P12 U1.P14 U1.P20 U1.P21 U1.R1 U1.R2 U1.R3 U1.R4 U1.R5 U1.R6 U1.R8 U1.R10 U1.R12 U1.R14 U1.R16 U1.R17 U1.R18 U1.R19 U1.R20 U1.R21 U1.T1 U1.T2 U1.T6 U1.T8 U1.T10 U1.T12 U1.T14 U1.T16 U1.T20 U1.T21 U1.U1 U1.U2 U1.U3 U1.U4 U1.U6 U1.U8 U1.U10 U1.U12 U1.U14 U1.U16 U1.U18 U1.U19 U1.U20 U1.U21 U1.V1 U1.V2 U1.V4 U1.V6 U1.V8 U1.V10 U1.V12 U1.V14 U1.V16 U1.V18 U1.V20 U1.V21 U1.W1 U1.W2 U1.W4 U1.W6 U1.W8 U1.W10 U1.W11 U1.W12 U1.W14 U1.W16 U1.W18 U1.W20 U1.W21 U1.Y1 U1.Y2 U1.Y3 U1.Y4 U1.Y5 U1.Y6 U1.Y7 U1.Y8 U1.Y9 U1.Y10 U1.Y11 U1.Y12 U1.Y13 U1.Y14 U1.Y15 U1.Y16 U1.Y17 U1.Y18 U1.Y19 U1.Y20 U1.Y21 U2.A1 U2.A2 U2.A5 U2.A8 U2.A11 U2.A12 U2.AA1 U2.AA2 U2.AA4 U2.AA9 U2.AA11 U2.AA12 U2.AB1 U2.AB2 U2.AB11 U2.AB12 U2.B1 U2.B2 U2.B4 U2.B9 U2.B10 U2.B11 U2.C2 U2.C3 U2.C4 U2.C9 U2.C10 U2.C11 U2.D3 U2.D10 U2.E2 U2.E3 U2.E4 U2.E9 U2.E10 U2.E11 U2.F2 U2.F4 U2.F9 U2.F11 U2.G2 U2.G11 U2.H2 U2.H3 U2.H4 U2.H9 U2.H10 U2.H11 U2.J1 U2.J2 U2.J3 U2.J4 U2.J5 U2.J8 U2.J9 U2.J10 U2.J11 U2.J12 U2.K1 U2.K2 U2.K3 U2.K4 U2.K5 U2.K8 U2.K9 U2.K10 U2.K11 U2.K12 U2.N1 U2.N2 U2.N3 U2.N4 U2.N5 U2.N8 U2.N9 U2.N10 U2.N11 U2.N12 U2.P1 U2.P2 U2.P3 U2.P4 U2.P5 U2.P8 U2.P9 U2.P10 U2.P11 U2.P12 U2.R1 U2.R2 U2.R3 U2.R4 U2.R5 U2.R8 U2.R9 U2.R10 U2.R11 U2.R12 U2.T1 U2.T2 U2.T3 U2.T4 U2.T5 U2.T8 U2.T9 U2.T10 U2.T11 U2.T12 U2.U1 U2.U2 U2.U3 U2.U4 U2.U5 U2.U8 U2.U9 U2.U10 U2.U11 U2.U12 U2.V1 U2.V2 U2.V3 U2.V4 U2.V5 U2.V8 U2.V9 U2.V10 U2.V11 U2.V12 U2.W1 U2.W2 U2.W3 U2.W4 U2.W5 U2.W8 U2.W9 U2.W10 U2.W11 U2.W12 U2.Y1 U2.Y2 U2.Y3 U2.Y4 U2.Y5 U2.Y8 U2.Y9 U2.Y10 U2.Y11 U2.Y12 U3.4 U3.6

## Text inside footprints (layer, text, board x,y; h text height)
U1: Top Overlay "21" at 3313.35,2041.88 h50 r90; Top Overlay "1" at 2919.55,2041.88 h50 r90; Top Overlay "AA" at 2799.95,1578.48 h50; Top Overlay "A" at 2824.95,1972.28 h50; Mechanical 13 "21" at 3313.35,2041.88 h50 r90; Mechanical 13 "1" at 2919.55,2041.88 h50 r90; Mechanical 13 "AA" at 2799.95,1578.48 h50; Mechanical 13 "A" at 2824.95,1972.28 h50; Bottom Overlay "21" at 3263.35,2041.88 h50 r270; Bottom Overlay "1" at 2869.55,2041.88 h50 r270; Bottom Overlay "AA" at 2849.95,1578.48 h50; Bottom Overlay "A" at 2849.95,1972.28 h50
U2: Top Overlay "A" at 2851.23,2834.08 h50; Top Overlay "AB" at 2826.23,2296.69 h50; Top Overlay "1" at 2952,2902.89 h50 r90; Top Overlay "12" at 3298.46,2902.89 h50 r90; Mechanical 13 "A" at 2851.23,2834.08 h50; Mechanical 13 "AB" at 2826.23,2296.69 h50; Mechanical 13 "1" at 2952,2902.89 h50 r90; Mechanical 13 "12" at 3298.46,2902.89 h50 r90; Bottom Overlay "A" at 2876.23,2834.08 h50; Bottom Overlay "AB" at 2876.23,2296.69 h50; Bottom Overlay "1" at 2902,2902.89 h50 r270; Bottom Overlay "12" at 3248.46,2902.89 h50 r270
U3: Mechanical 13 "*" at 2265,3372 h50 r180